# EAGLE board 3xAkPlat2 (EAGLE 9.6.2)
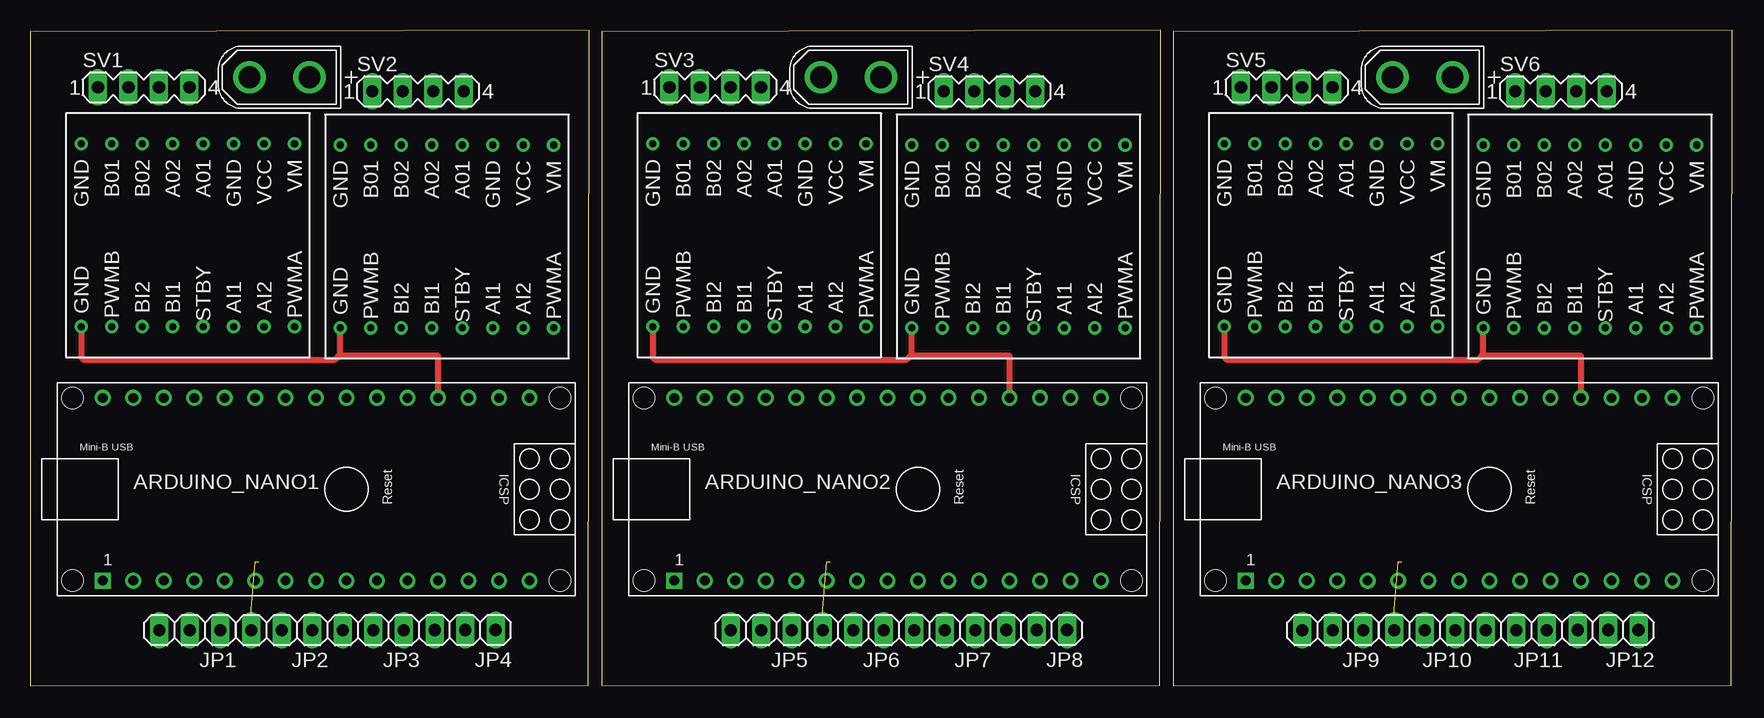
[diagram p0: board, top side]
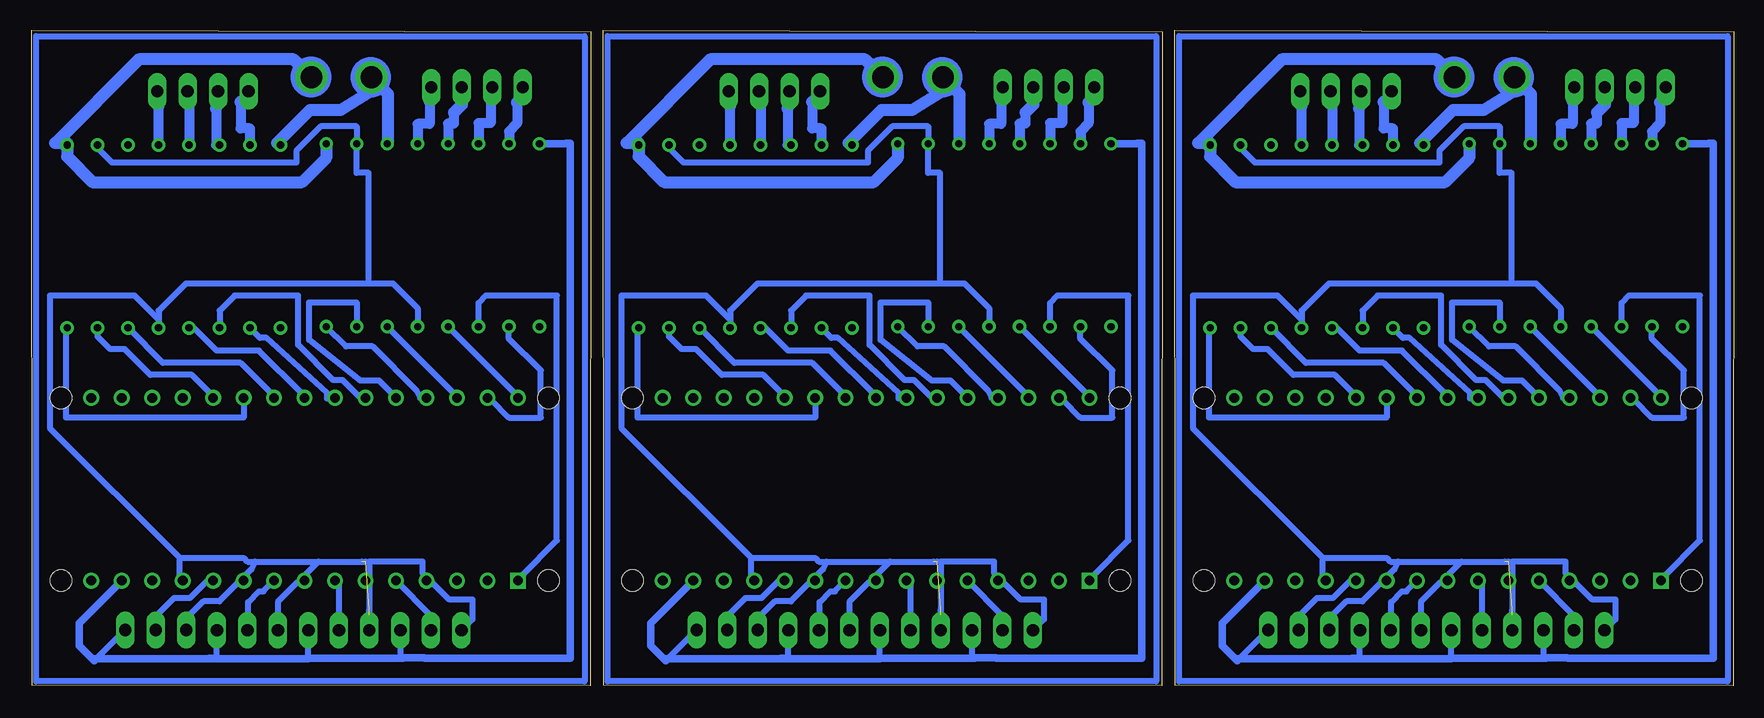
[diagram p1: board, bottom side, seen from below]

Size 141.83 x 54.62 mm. Coordinates in mm from the lower left corner, seen from the top.
Outline: 46.52,0.03 46.58,54.62 0,54.51 0.01,0 46.52,0.03
Outline: 94.15,0.03 94.2,54.62 47.63,54.51 47.64,0 94.15,0.03
Outline: 141.77,0.03 141.83,54.62 95.25,54.51 95.26,0 141.77,0.03
Copper layers (1*16): Top 0.035mm / dielectric 1.5mm / Bottom 0.035mm
Design rules "default": minimum track width 6mil, minimum drill 0.35mm, track to track 6mil, track to pad 6mil, pad to pad 6mil, via to via 6mil, smd to smd 6mil, copper to edge 40mil, drill to drill 6mil, minimum pad ring 10mil, minimum via ring 8mil, stop-mask expansion 4mil, vias tented up to drill 0mil, thermal gap 10mil

## Footprints (pad centres in the part's own frame; a part is rotated, then mirrored left to right if it is on the bottom)
ARDUINO_NANO = drill 0.8 square: 1 -20.32,-7.62 | drill 0.8: 2 -17.78,-7.62; 3 -15.24,-7.62; 4 -12.7,-7.62; 5 -10.16,-7.62; 6 -7.62,-7.62; 7 -5.08,-7.62; 8 -2.54,-7.62; 9 0,-7.62; 10 2.54,-7.62; 11 5.08,-7.62; 12 7.62,-7.62; 13 10.16,-7.62; 14 12.7,-7.62; 15 15.24,-7.62; 16 15.24,7.62; 17 12.7,7.62; 18 10.16,7.62; 19 7.62,7.62; 20 5.08,7.62; 21 2.54,7.62; 22 0,7.62; 23 -2.54,7.62; 24 -5.08,7.62; 25 -7.62,7.62; 26 -10.16,7.62; 27 -12.7,7.62; 28 -15.24,7.62; 29 -17.78,7.62; 30 -20.32,7.62 | hole 1.778: -22.86,-7.62; -22.86,7.62; 17.78,7.62; 17.78,-7.62
XT30UPB-M = drill 1.8: + 2.5,0; - -2.5,0
1X03 = drill 1.016 long: 1 -2.54,0; 2 0,0; 3 2.54,0
MA04-1 = drill 1.016 long: 1 -3.81,0; 2 -1.27,0; 3 1.27,0; 4 3.81,0
CONTROLLER = drill 0.6: 1 2.54,1.27; 2 2.54,3.81; 3 2.54,6.35; 4 2.54,8.89; 5 2.54,11.43; 6 2.54,13.97; 7 2.54,16.51; 8 2.54,19.05; 9 17.78,1.27; 10 17.78,3.81; 11 17.78,6.35; 12 17.78,8.89; 13 17.78,11.43; 14 17.78,13.97; 15 17.78,16.51; 16 17.78,19.05

## Placement (x,y rotation side)
ARDUINO_NANO1  [ARDUINO_NANO]  26.37,16.36 0 top
ARDUINO_NANO2  [ARDUINO_NANO]  73.99,16.36 0 top
ARDUINO_NANO3  [ARDUINO_NANO]  121.62,16.36 0 top
CON1  XT30UPB-M  [XT30UPB-M]  20.76,50.7 0 top
CON2  XT30UPB-M  [XT30UPB-M]  68.39,50.7 0 top
CON3  XT30UPB-M  [XT30UPB-M]  116.01,50.7 0 top
JP1  [1X03]  13.3,4.62 180 top
JP2  [1X03]  20.97,4.62 180 top
JP3  [1X03]  28.59,4.62 180 top
JP4  [1X03]  36.24,4.64 180 top
JP5  [1X03]  60.92,4.62 180 top
JP6  [1X03]  68.59,4.62 180 top
JP7  [1X03]  76.21,4.62 180 top
JP8  [1X03]  83.86,4.64 180 top
JP9  [1X03]  108.55,4.62 180 top
JP10  [1X03]  116.22,4.62 180 top
JP11  [1X03]  123.84,4.62 180 top
JP12  [1X03]  131.49,4.64 180 top
SV1  [MA04-1]  9.46,49.86 0 top
SV2  [MA04-1]  32.31,49.53 0 top
SV3  [MA04-1]  57.08,49.86 0 top
SV4  [MA04-1]  79.93,49.53 0 top
SV5  [MA04-1]  104.71,49.86 0 top
SV6  [MA04-1]  127.56,49.53 0 top
U$1  CONTROLLER  [CONTROLLER]  2.98,47.69 270 top
U$2  CONTROLLER  [CONTROLLER]  24.57,47.59 270 top
U$3  CONTROLLER  [CONTROLLER]  50.6,47.69 270 top
U$4  CONTROLLER  [CONTROLLER]  72.19,47.59 270 top
U$5  CONTROLLER  [CONTROLLER]  98.23,47.69 270 top
U$6  CONTROLLER  [CONTROLLER]  119.82,47.59 270 top

## Library data of the parts
ARDUINO_NANO1-ARDUINO_NANO3 = ArduinoNanoV30
CON1-CON3 = amass
JP1-JP12 = pinhead
SV1-SV6 = con-lstb; OC_FARNELL: unknown; OC_NEWARK: unknown
U$1-U$6 = Motorcontroller

## Nets
BIN1: ARDUINO_NANO2.1 U$3.11
BIN2: ARDUINO_NANO1.1 U$1.11
BIN3: ARDUINO_NANO3.1 U$5.11
N$1: ARDUINO_NANO1.19 U$1.9 U$2.9
N$2: CON1.- U$1.6 U$2.1
N$3: ARDUINO_NANO1.27 U$1.16
N$4: ARDUINO_NANO1.25 U$2.11
N$5: ARDUINO_NANO1.30 U$1.12
N$6: ARDUINO_NANO1.29 U$1.10
N$7: ARDUINO_NANO1.28 U$1.14
N$8: CON1.+ U$1.8 U$2.8
N$9: ARDUINO_NANO1.26 U$1.15
N$10: ARDUINO_NANO1.24 U$2.10
N$11: ARDUINO_NANO1.21 U$2.16
N$12: ARDUINO_NANO1.20 U$2.15
N$13: ARDUINO_NANO1.22 U$2.14
N$14: ARDUINO_NANO1.23 U$2.12
N$15: ARDUINO_NANO1.7 JP2.2
N$16: SV1.1 U$1.2
N$17: SV1.2 U$1.3
N$18: SV1.3 U$1.4
N$19: SV1.4 U$1.5
N$20: SV2.1 U$2.2
N$21: SV2.2 U$2.3
N$22: SV2.3 U$2.4
N$23: SV2.4 U$2.5
N$24: ARDUINO_NANO1.14 JP1.1 JP2.1 JP3.1 JP4.1 U$1.1
N$25: ARDUINO_NANO1.5 JP1.2
N$26: ARDUINO_NANO1.9 JP3.2
N$27: ARDUINO_NANO1.11 JP4.2
N$28: ARDUINO_NANO1.12 JP1.3 JP2.3 JP3.3 JP4.3 U$1.7 U$1.13 U$2.7 U$2.13
N$30: ARDUINO_NANO2.19 U$3.9 U$4.9
N$31: ARDUINO_NANO2.30 U$3.12
N$32: ARDUINO_NANO2.29 U$3.10
N$33: ARDUINO_NANO2.27 U$3.16
N$34: ARDUINO_NANO2.28 U$3.14
N$35: ARDUINO_NANO2.26 U$3.15
N$36: ARDUINO_NANO2.24 U$4.10
N$37: ARDUINO_NANO2.21 U$4.16
N$38: ARDUINO_NANO2.20 U$4.15
N$39: ARDUINO_NANO2.22 U$4.14
N$40: ARDUINO_NANO2.23 U$4.12
N$41: ARDUINO_NANO2.25 U$4.11
N$42: CON2.- U$3.6 U$4.1
N$43: CON2.+ U$3.8 U$4.8
N$44: SV3.1 U$3.2
N$45: SV3.2 U$3.3
N$46: SV3.3 U$3.4
N$47: SV3.4 U$3.5
N$48: SV4.1 U$4.2
N$49: SV4.2 U$4.3
N$50: SV4.3 U$4.4
N$51: SV4.4 U$4.5
N$52: ARDUINO_NANO2.14 JP5.1 JP6.1 JP7.1 JP8.1 U$3.1
N$53: ARDUINO_NANO2.5 JP5.2
N$54: ARDUINO_NANO2.7 JP6.2
N$55: ARDUINO_NANO2.9 JP7.2
N$56: ARDUINO_NANO2.11 JP8.2
N$57: ARDUINO_NANO2.12 JP5.3 JP6.3 JP7.3 JP8.3 U$3.7 U$3.13 U$4.7 U$4.13
N$59: ARDUINO_NANO3.19 U$5.9 U$6.9
N$60: ARDUINO_NANO3.30 U$5.12
N$61: ARDUINO_NANO3.29 U$5.10
N$62: ARDUINO_NANO3.27 U$5.16
N$63: ARDUINO_NANO3.28 U$5.14
N$64: ARDUINO_NANO3.26 U$5.15
N$65: ARDUINO_NANO3.24 U$6.10
N$66: ARDUINO_NANO3.21 U$6.16
N$67: ARDUINO_NANO3.20 U$6.15
N$68: ARDUINO_NANO3.22 U$6.14
N$69: ARDUINO_NANO3.23 U$6.12
N$70: ARDUINO_NANO3.25 U$6.11
N$71: CON3.- U$5.6 U$6.1
N$72: CON3.+ U$5.8 U$6.8
N$73: SV5.1 U$5.2
N$74: SV5.2 U$5.3
N$75: SV5.3 U$5.4
N$76: SV5.4 U$5.5
N$77: SV6.1 U$6.2
N$78: SV6.2 U$6.3
N$79: SV6.3 U$6.4
N$80: SV6.4 U$6.5
N$81: ARDUINO_NANO3.14 JP9.1 JP10.1 JP11.1 JP12.1 U$5.1
N$82: ARDUINO_NANO3.5 JP9.2
N$83: ARDUINO_NANO3.7 JP10.2
N$84: ARDUINO_NANO3.9 JP11.2
N$85: ARDUINO_NANO3.11 JP12.2
N$86: ARDUINO_NANO3.12 JP9.3 JP10.3 JP11.3 JP12.3 U$5.7 U$5.13 U$6.7 U$6.13
VIN: ARDUINO_NANO1.15
VIN1: ARDUINO_NANO2.15
VIN2: ARDUINO_NANO3.15

## Tracks (layer width: path | path; a pad name or v marks a point on that pad's centre or on a via)
BIN1
  Bottom 0.508: U$3.11 56.95,31.88 56.34,32.49 50.43,32.49 50.43,12.11 53.42,9.12 ARDUINO_NANO2.1
BIN2
  Bottom 0.508: U$1.11 9.33,31.88 8.71,32.49 2.81,32.49 2.81,12.11 5.79,9.12 ARDUINO_NANO1.1
BIN3
  Bottom 0.508: U$5.11 104.58,31.88 103.96,32.49 98.06,32.49 98.06,12.11 101.04,9.12 ARDUINO_NANO3.1
N$1
  Top 0.508: U$1.9 4.25,27.37 4.46,27.16 25.41,27.16 25.73,27.48 25.84,27.48 | 25.84,27.48 U$2.9 | ARDUINO_NANO1.19 33.99,27.48 25.84,27.48
N$2
  Bottom 0.508: U$1.6 16.88,45.22
  Bottom 1.016: U$2.1 25.98,45.2 26.14,45.2 23.38,47.96 20.83,47.96 18.26,49.53 CON1.- 16.88,49.31 16.88,45.22
N$3
  Bottom 0.508: U$1.16 20.38,28.26 18.16,28.26 14.51,24.61 14.19,23.98 ARDUINO_NANO1.27
N$4
  Bottom 0.508: ARDUINO_NANO1.25 18.89,24.12 19.32,24.12 20.07,24.88 20.67,25.48 21.46,25.48 24.37,28.39 24.37,32.49 29.67,32.49 30.92,31.24 U$2.11
N$5
  Bottom 0.508: U$1.12 11.82,29.91 11.82,29.88 6.3,24.36 ARDUINO_NANO1.30
N$6
  Bottom 0.508: U$1.10 6.84,29.86 6.84,28.97 4.14,26.27 4.14,22.33 6.81,22.33 8.33,23.86 ARDUINO_NANO1.29
N$7
  Bottom 0.508: U$1.14 16.93,29.91 11.38,24.36 ARDUINO_NANO1.28
N$8
  Bottom 1.016: CON1.+ 24.74,52.18 37.66,52.18 44.62,45.21 43.62,45.21 43.78,45.05 | U$1.8 22.03,43.97 24.03,41.97 41.51,41.97 43.62,44.08 U$2.8 43.78,45.05 | 43.78,45.05 43.8,45.03
N$9
  Bottom 0.508: ARDUINO_NANO1.26 16.21,24 17.62,25.41 19.15,25.41 23.44,28.81 23.44,31.93 19.49,31.93 U$1.15
N$10
  Bottom 0.508: U$2.10 27.55,28.98 27,28.98 21.95,24.4 21.95,23.92 21.82,23.98 ARDUINO_NANO1.24
N$11
  Bottom 0.508: U$2.16 43.71,29.72 43.71,22.33 28.91,22.33 ARDUINO_NANO1.21
N$12
  Bottom 0.508: U$2.15 41.08,29.08 40.04,28.03 38.83,28.03 36.68,25.89 33.22,25.89 31.7,24.36 ARDUINO_NANO1.20
N$13
  Bottom 0.508: U$2.14 35.63,26.9 29.16,26.9 26.62,24.36 ARDUINO_NANO1.22
N$14
  Bottom 0.508: U$2.12 33.05,29.81 31.15,27.92 27.64,27.92 24.08,24.36 ARDUINO_NANO1.23
N$15
  Bottom 0.508: ARDUINO_NANO1.7 20.97,8.43 JP2.2
N$16
  Bottom 0.813: 6.11,48.61 6.11,46.85 6.79,46.17 U$1.2
  Bottom 1.016: SV1.1 5.65,49.07 6.11,48.61
N$17
  Bottom 0.813: 8.33,48.92 8.33,46.88 9.33,46.88 U$1.3
  Bottom 1.016: SV1.2 8.19,49.07 8.33,48.92
N$18
  Bottom 0.813: 11.38,47.76 11.38,46.84 11.87,46.84 U$1.4
  Bottom 1.016: SV1.3 10.73,48.41 11.38,47.76
N$19
  Bottom 0.813: 13.41,48.74 13.41,46.81 14.41,46.81 U$1.5
  Bottom 1.016: SV1.4 13.27,48.88 13.41,48.74
N$20
  Bottom 0.813: 29.16,48.62 29.16,46.43 28.38,46.43 U$2.2
  Bottom 1.016: SV2.1 28.5,49.28 29.16,48.62
N$21
  Bottom 0.813: 31.19,48.11 31.19,45.05 U$2.3
  Bottom 1.016: SV2.2 31.19,49.38 31.19,48.11
N$22
  Bottom 0.813: 33.46,48.4 U$2.4
  Bottom 1.016: SV2.3 33.58,48.52 33.46,48.4
N$23
  Bottom 0.813: U$2.5 36,48.3 36,48.66
  Bottom 1.016: SV2.4 36.12,48.42 36,48.3
N$24
  Bottom 0.508: JP1.1 15.84,2.28 | 23.51,2.24 23.51,2.28 JP2.1 | 31.76,2.24 31.76,2.28 | 31.13,2.28 JP3.1 | JP4.1 41.34,2.07
  Bottom 0.61: 23.51,2.28 15.84,2.28 15.62,2.28 15.57,2.32 13.86,2.32 13.82,2.28 1.7,2.28 1.7,45.19 2.06,45.19 2.1,45.15 U$1.1 | 23.51,2.24 31.76,2.24 41.51,2.24 | ARDUINO_NANO1.14 42.6,5.21 42.6,3.34 41.51,2.24 | 41.51,2.24 41.34,2.07 | 31.76,2.28 31.13,2.28
N$25
  Bottom 0.508: JP1.2 13.3,5.84 ARDUINO_NANO1.5
N$26
  Bottom 0.508: JP3.2 28.52,4.68 28.52,6.96 27.63,7.85 27.25,7.85 ARDUINO_NANO1.9
N$27
  Bottom 0.508: JP4.2 36.24,5.78 34.7,7.31 33.36,7.31 31.93,8.74 31.76,8.74 | ARDUINO_NANO1.11 31.76,8.74 | 31.45,8.81 31.7,8.81 31.76,8.74
N$28  (3 unrouted)
  Bottom 0.508: 18.43,5.89 18.43,10.33 13.98,10.33 13.98,9.38 11.76,7.16 9.86,7.16 9.86,5.52 JP1.3 | 27.95,10.33 28.59,10.33 28.91,10.65 34.24,10.65 | 27.95,10.33 19.06,10.33 | 18.75,10.33 22.69,10.33 26.05,6.97 JP3.3 | U$2.7 41.08,44.78 39.87,43.57 24.52,43.57 24.52,44.57 22.49,46.6 19.49,46.6 U$1.7 19.49,42.72 18.49,42.72 18.49,33.51 | 18.49,33.51 16.46,33.51 14.41,31.46 U$1.13 | 18.49,33.51 33.73,33.51 36,31.24 U$2.13 36,30.51 37.99,32.49 45.05,32.49 45.05,21.46 34.24,10.65 | 34.24,10.65 34.24,9.12 ARDUINO_NANO1.12 | JP2.3 18.43,6.38 | 27.95,10.33 28.27,9.7 30.94,7.03 32.27,7.03 33.7,5.6 JP4.3
N$29
  Bottom 0.508: 46.2,0.35 46.2,54.13 0.49,54.13 0.49,0.35 46.2,0.35
N$30
  Top 0.508: U$3.9 51.87,27.37 52.08,27.16 73.04,27.16 73.36,27.48 73.46,27.48 | 73.46,27.48 U$4.9 | ARDUINO_NANO2.19 81.61,27.48 73.46,27.48
N$31
  Bottom 0.508: U$3.12 59.44,29.91 59.44,29.88 53.92,24.36 ARDUINO_NANO2.30
N$32
  Bottom 0.508: U$3.10 54.46,29.86 54.46,28.97 51.77,26.27 51.77,22.33 54.43,22.33 55.96,23.86 ARDUINO_NANO2.29
N$33
  Bottom 0.508: U$3.16 68,28.26 65.79,28.26 62.13,24.61 61.82,23.98 ARDUINO_NANO2.27
N$34
  Bottom 0.508: U$3.14 64.55,29.91 59,24.36 ARDUINO_NANO2.28
N$35
  Bottom 0.508: ARDUINO_NANO2.26 63.83,24 65.24,25.41 66.77,25.41 71.07,28.81 71.07,31.93 67.11,31.93 U$3.15
N$36
  Bottom 0.508: U$4.10 75.17,28.98 74.62,28.98 69.57,24.4 69.57,23.92 69.44,23.98 ARDUINO_NANO2.24
N$37
  Bottom 0.508: U$4.16 91.34,29.72 91.34,22.33 76.53,22.33 ARDUINO_NANO2.21
N$38
  Bottom 0.508: U$4.15 88.7,29.08 87.66,28.03 86.46,28.03 84.31,25.89 80.85,25.89 79.32,24.36 ARDUINO_NANO2.20
N$39
  Bottom 0.508: U$4.14 83.26,26.9 76.78,26.9 74.24,24.36 ARDUINO_NANO2.22
N$40
  Bottom 0.508: U$4.12 80.67,29.81 78.78,27.92 75.26,27.92 71.7,24.36 ARDUINO_NANO2.23
N$41
  Bottom 0.508: ARDUINO_NANO2.25 66.51,24.12 66.95,24.12 67.69,24.88 68.29,25.48 69.09,25.48 72,28.39 72,32.49 77.29,32.49 78.54,31.24 U$4.11
N$42
  Bottom 0.508: U$3.6 64.51,45.22
  Bottom 1.016: U$4.1 73.61,45.2 73.77,45.2 71.01,47.96 68.46,47.96 65.89,49.53 CON2.- 64.51,49.31 64.51,45.22
N$43
  Bottom 1.016: CON2.+ 72.37,52.18 85.28,52.18 92.25,45.21 91.24,45.21 91.4,45.05 | U$3.8 69.65,43.97 71.65,41.97 89.14,41.97 91.24,44.08 U$4.8 91.4,45.05 | 91.4,45.05 91.43,45.03
N$44
  Bottom 0.813: 53.73,48.61 53.73,46.85 54.41,46.17 U$3.2
  Bottom 1.016: SV3.1 53.27,49.07 53.73,48.61
N$45
  Bottom 0.813: 55.96,48.92 55.96,46.88 56.95,46.88 U$3.3
  Bottom 1.016: SV3.2 55.81,49.07 55.96,48.92
N$46
  Bottom 0.813: 59,47.76 59,46.84 59.49,46.84 U$3.4
  Bottom 1.016: SV3.3 58.35,48.41 59,47.76
N$47
  Bottom 0.813: 61.04,48.74 61.04,46.81 62.03,46.81 U$3.5
  Bottom 1.016: SV3.4 60.89,48.88 61.04,48.74
N$48
  Bottom 0.813: 76.78,48.62 76.78,46.43 76,46.43 U$4.2
  Bottom 1.016: SV4.1 76.12,49.28 76.78,48.62
N$49
  Bottom 0.813: 78.82,48.11 78.82,45.05 U$4.3
  Bottom 1.016: SV4.2 78.82,49.38 78.82,48.11
N$50
  Bottom 0.813: 81.08,48.4 U$4.4
  Bottom 1.016: SV4.3 81.2,48.52 81.08,48.4
N$51
  Bottom 0.813: U$4.5 83.62,48.3 83.62,48.66
  Bottom 1.016: SV4.4 83.74,48.42 83.62,48.3
N$52
  Bottom 0.508: JP5.1 63.46,2.28 | 71.13,2.24 71.13,2.28 JP6.1 | 79.39,2.24 79.39,2.28 | 78.75,2.28 JP7.1 | JP8.1 88.97,2.07
  Bottom 0.61: 71.13,2.28 63.46,2.28 63.24,2.28 63.2,2.32 61.49,2.32 61.44,2.28 49.32,2.28 49.32,45.19 49.68,45.19 49.72,45.15 U$3.1 | 71.13,2.24 79.39,2.24 89.13,2.24 | ARDUINO_NANO2.14 90.23,5.21 90.23,3.34 89.13,2.24 | 89.13,2.24 88.97,2.07 | 79.39,2.28 78.75,2.28
N$53
  Bottom 0.508: JP5.2 60.92,5.84 ARDUINO_NANO2.5
N$54
  Bottom 0.508: ARDUINO_NANO2.7 68.59,8.43 JP6.2
N$55
  Bottom 0.508: JP7.2 76.15,4.68 76.15,6.96 75.26,7.85 74.88,7.85 ARDUINO_NANO2.9
N$56
  Bottom 0.508: JP8.2 83.86,5.78 82.33,7.31 80.99,7.31 79.56,8.74 79.39,8.74 | ARDUINO_NANO2.11 79.39,8.74 | 79.07,8.81 79.32,8.81 79.39,8.74
N$57  (3 unrouted)
  Bottom 0.508: 66.05,5.89 66.05,10.33 61.61,10.33 61.61,9.38 59.39,7.16 57.48,7.16 57.48,5.52 JP5.3 | 75.58,10.33 76.21,10.33 76.53,10.65 81.86,10.65 | 75.58,10.33 66.69,10.33 | 66.37,10.33 70.31,10.33 73.67,6.97 JP7.3 | U$4.7 88.7,44.78 87.5,43.57 72.14,43.57 72.14,44.57 70.12,46.6 67.11,46.6 U$3.7 67.11,42.72 66.12,42.72 66.12,33.51 | 66.12,33.51 64.08,33.51 62.03,31.46 U$3.13 | 66.12,33.51 81.36,33.51 83.62,31.24 U$4.13 83.62,30.51 85.61,32.49 92.68,32.49 92.68,21.46 81.86,10.65 | 81.86,10.65 81.86,9.12 ARDUINO_NANO2.12 | JP6.3 66.05,6.38 | 75.58,10.33 75.9,9.7 78.56,7.03 79.9,7.03 81.32,5.6 JP8.3
N$58
  Bottom 0.508: 93.83,0.35 93.83,54.13 48.11,54.13 48.11,0.35 93.83,0.35
N$59
  Top 0.508: U$5.9 99.5,27.37 99.71,27.16 120.66,27.16 120.98,27.48 121.09,27.48 | 121.09,27.48 U$6.9 | ARDUINO_NANO3.19 129.24,27.48 121.09,27.48
N$60
  Bottom 0.508: U$5.12 107.07,29.91 107.07,29.88 101.55,24.36 ARDUINO_NANO3.30
N$61
  Bottom 0.508: U$5.10 102.09,29.86 102.09,28.97 99.39,26.27 99.39,22.33 102.06,22.33 103.58,23.86 ARDUINO_NANO3.29
N$62
  Bottom 0.508: U$5.16 115.63,28.26 113.41,28.26 109.76,24.61 109.44,23.98 ARDUINO_NANO3.27
N$63
  Bottom 0.508: U$5.14 112.18,29.91 106.63,24.36 ARDUINO_NANO3.28
N$64
  Bottom 0.508: ARDUINO_NANO3.26 111.46,24 112.87,25.41 114.4,25.41 118.69,28.81 118.69,31.93 114.74,31.93 U$5.15
N$65
  Bottom 0.508: U$6.10 122.8,28.98 122.25,28.98 117.2,24.4 117.2,23.92 117.07,23.98 ARDUINO_NANO3.24
N$66
  Bottom 0.508: U$6.16 138.96,29.72 138.96,22.33 124.16,22.33 ARDUINO_NANO3.21
N$67
  Bottom 0.508: U$6.15 136.33,29.08 135.29,28.03 134.08,28.03 131.93,25.89 128.47,25.89 126.95,24.36 ARDUINO_NANO3.20
N$68
  Bottom 0.508: U$6.14 130.88,26.9 124.41,26.9 121.87,24.36 ARDUINO_NANO3.22
N$69
  Bottom 0.508: U$6.12 128.3,29.81 126.4,27.92 122.89,27.92 119.33,24.36 ARDUINO_NANO3.23
N$70
  Bottom 0.508: ARDUINO_NANO3.25 114.14,24.12 114.57,24.12 115.32,24.88 115.92,25.48 116.71,25.48 119.62,28.39 119.62,32.49 124.92,32.49 126.17,31.24 U$6.11
N$71
  Bottom 0.508: U$5.6 112.13,45.22
  Bottom 1.016: U$6.1 121.23,45.2 121.39,45.2 118.63,47.96 116.08,47.96 113.51,49.53 CON3.- 112.13,49.31 112.13,45.22
N$72
  Bottom 1.016: CON3.+ 119.99,52.18 132.91,52.18 139.87,45.21 138.87,45.21 139.03,45.05 | U$5.8 117.28,43.97 119.28,41.97 136.76,41.97 138.87,44.08 U$6.8 139.03,45.05 | 139.03,45.05 139.05,45.03
N$73
  Bottom 0.813: 101.36,48.61 101.36,46.85 102.04,46.17 U$5.2
  Bottom 1.016: SV5.1 100.9,49.07 101.36,48.61
N$74
  Bottom 0.813: 103.58,48.92 103.58,46.88 104.58,46.88 U$5.3
  Bottom 1.016: SV5.2 103.44,49.07 103.58,48.92
N$75
  Bottom 0.813: 106.63,47.76 106.63,46.84 107.12,46.84 U$5.4
  Bottom 1.016: SV5.3 105.98,48.41 106.63,47.76
N$76
  Bottom 0.813: 108.66,48.74 108.66,46.81 109.66,46.81 U$5.5
  Bottom 1.016: SV5.4 108.52,48.88 108.66,48.74
N$77
  Bottom 0.813: 124.41,48.62 124.41,46.43 123.63,46.43 U$6.2
  Bottom 1.016: SV6.1 123.75,49.28 124.41,48.62
N$78
  Bottom 0.813: 126.44,48.11 126.44,45.05 U$6.3
  Bottom 1.016: SV6.2 126.44,49.38 126.44,48.11
N$79
  Bottom 0.813: 128.71,48.4 U$6.4
  Bottom 1.016: SV6.3 128.83,48.52 128.71,48.4
N$80
  Bottom 0.813: U$6.5 131.25,48.3 131.25,48.66
  Bottom 1.016: SV6.4 131.37,48.42 131.25,48.3
N$81
  Bottom 0.508: JP9.1 111.09,2.28 | 118.76,2.24 118.76,2.28 JP10.1 | 127.01,2.24 127.01,2.28 | 126.38,2.28 JP11.1 | JP12.1 136.59,2.07
  Bottom 0.61: 118.76,2.28 111.09,2.28 110.87,2.28 110.82,2.32 109.11,2.32 109.07,2.28 96.95,2.28 96.95,45.19 97.31,45.19 97.35,45.15 U$5.1 | 118.76,2.24 127.01,2.24 136.76,2.24 | ARDUINO_NANO3.14 137.85,5.21 137.85,3.34 136.76,2.24 | 136.76,2.24 136.59,2.07 | 127.01,2.28 126.38,2.28
N$82
  Bottom 0.508: JP9.2 108.55,5.84 ARDUINO_NANO3.5
N$83
  Bottom 0.508: ARDUINO_NANO3.7 116.22,8.43 JP10.2
N$84
  Bottom 0.508: JP11.2 123.77,4.68 123.77,6.96 122.88,7.85 122.5,7.85 ARDUINO_NANO3.9
N$85
  Bottom 0.508: JP12.2 131.49,5.78 129.95,7.31 128.61,7.31 127.18,8.74 127.01,8.74 | ARDUINO_NANO3.11 127.01,8.74 | 126.7,8.81 126.95,8.81 127.01,8.74
N$86  (3 unrouted)
  Bottom 0.508: 113.68,5.89 113.68,10.33 109.23,10.33 109.23,9.38 107.01,7.16 105.11,7.16 105.11,5.52 JP9.3 | 123.2,10.33 123.84,10.33 124.16,10.65 129.49,10.65 | 123.2,10.33 114.31,10.33 | 114,10.33 117.94,10.33 121.3,6.97 JP11.3 | U$6.7 136.33,44.78 135.12,43.57 119.77,43.57 119.77,44.57 117.74,46.6 114.74,46.6 U$5.7 114.74,42.72 113.74,42.72 113.74,33.51 | 113.74,33.51 111.71,33.51 109.66,31.46 U$5.13 | 113.74,33.51 128.98,33.51 131.25,31.24 U$6.13 131.25,30.51 133.24,32.49 140.3,32.49 140.3,21.46 129.49,10.65 | 129.49,10.65 129.49,9.12 ARDUINO_NANO3.12 | JP10.3 113.68,6.38 | 123.2,10.33 123.52,9.7 126.19,7.03 127.52,7.03 128.95,5.6 JP12.3
N$87
  Bottom 0.508: 141.45,0.35 141.45,54.13 95.74,54.13 95.74,0.35 141.45,0.35
(copper drawn outside any net)
  shapes: Bottom circle x6